# Altium PCB v2car.PcbDoc
Units mil, origin at the board's own origin, x right, y up, seen from the top; angles counter-clockwise.
Board outline 2911 x 2468.99 mil, 2 copper layers (Top Layer, Bottom Layer); 18 components, 25 nets, 119 pads, 46 vias.
Unrouted connection lines stored in the file: 45.
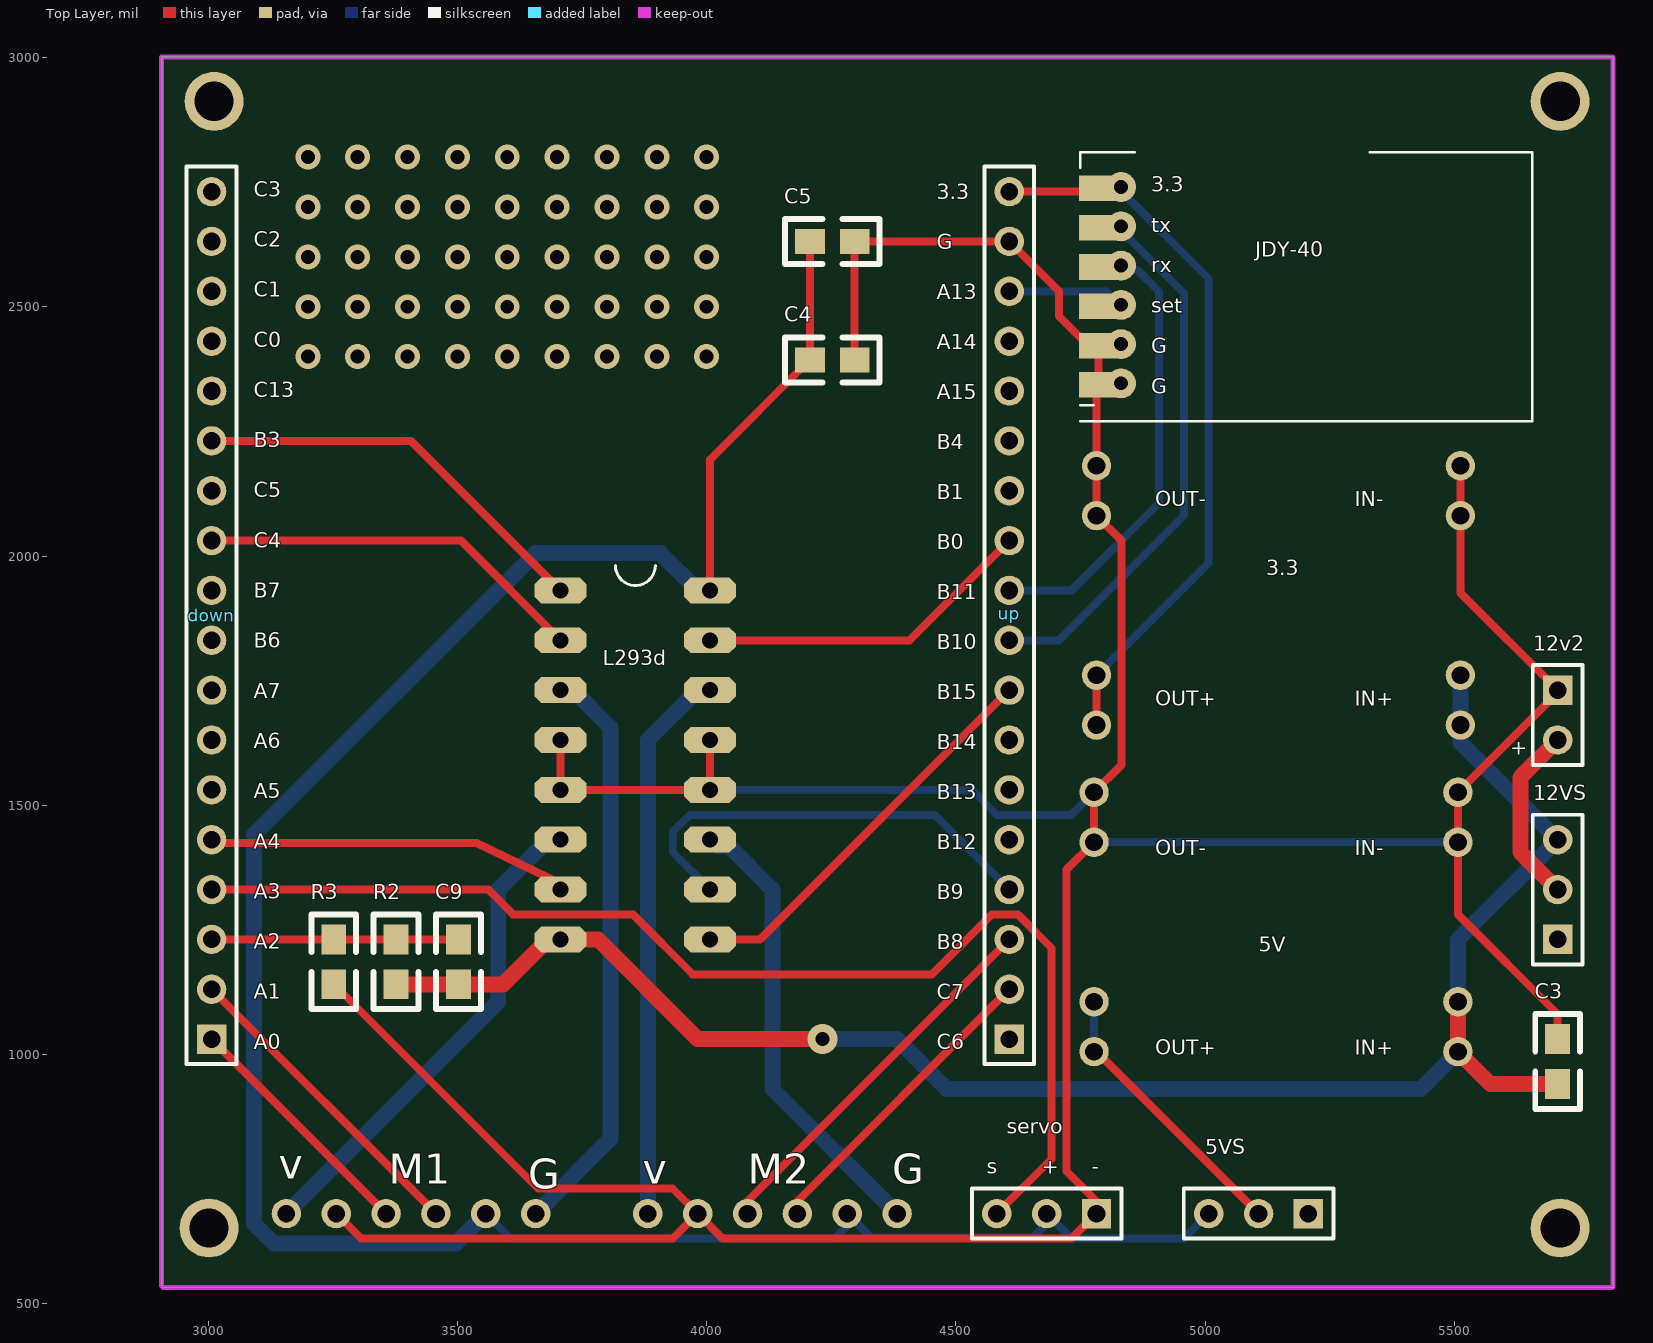
[diagram p0: Top Layer view]
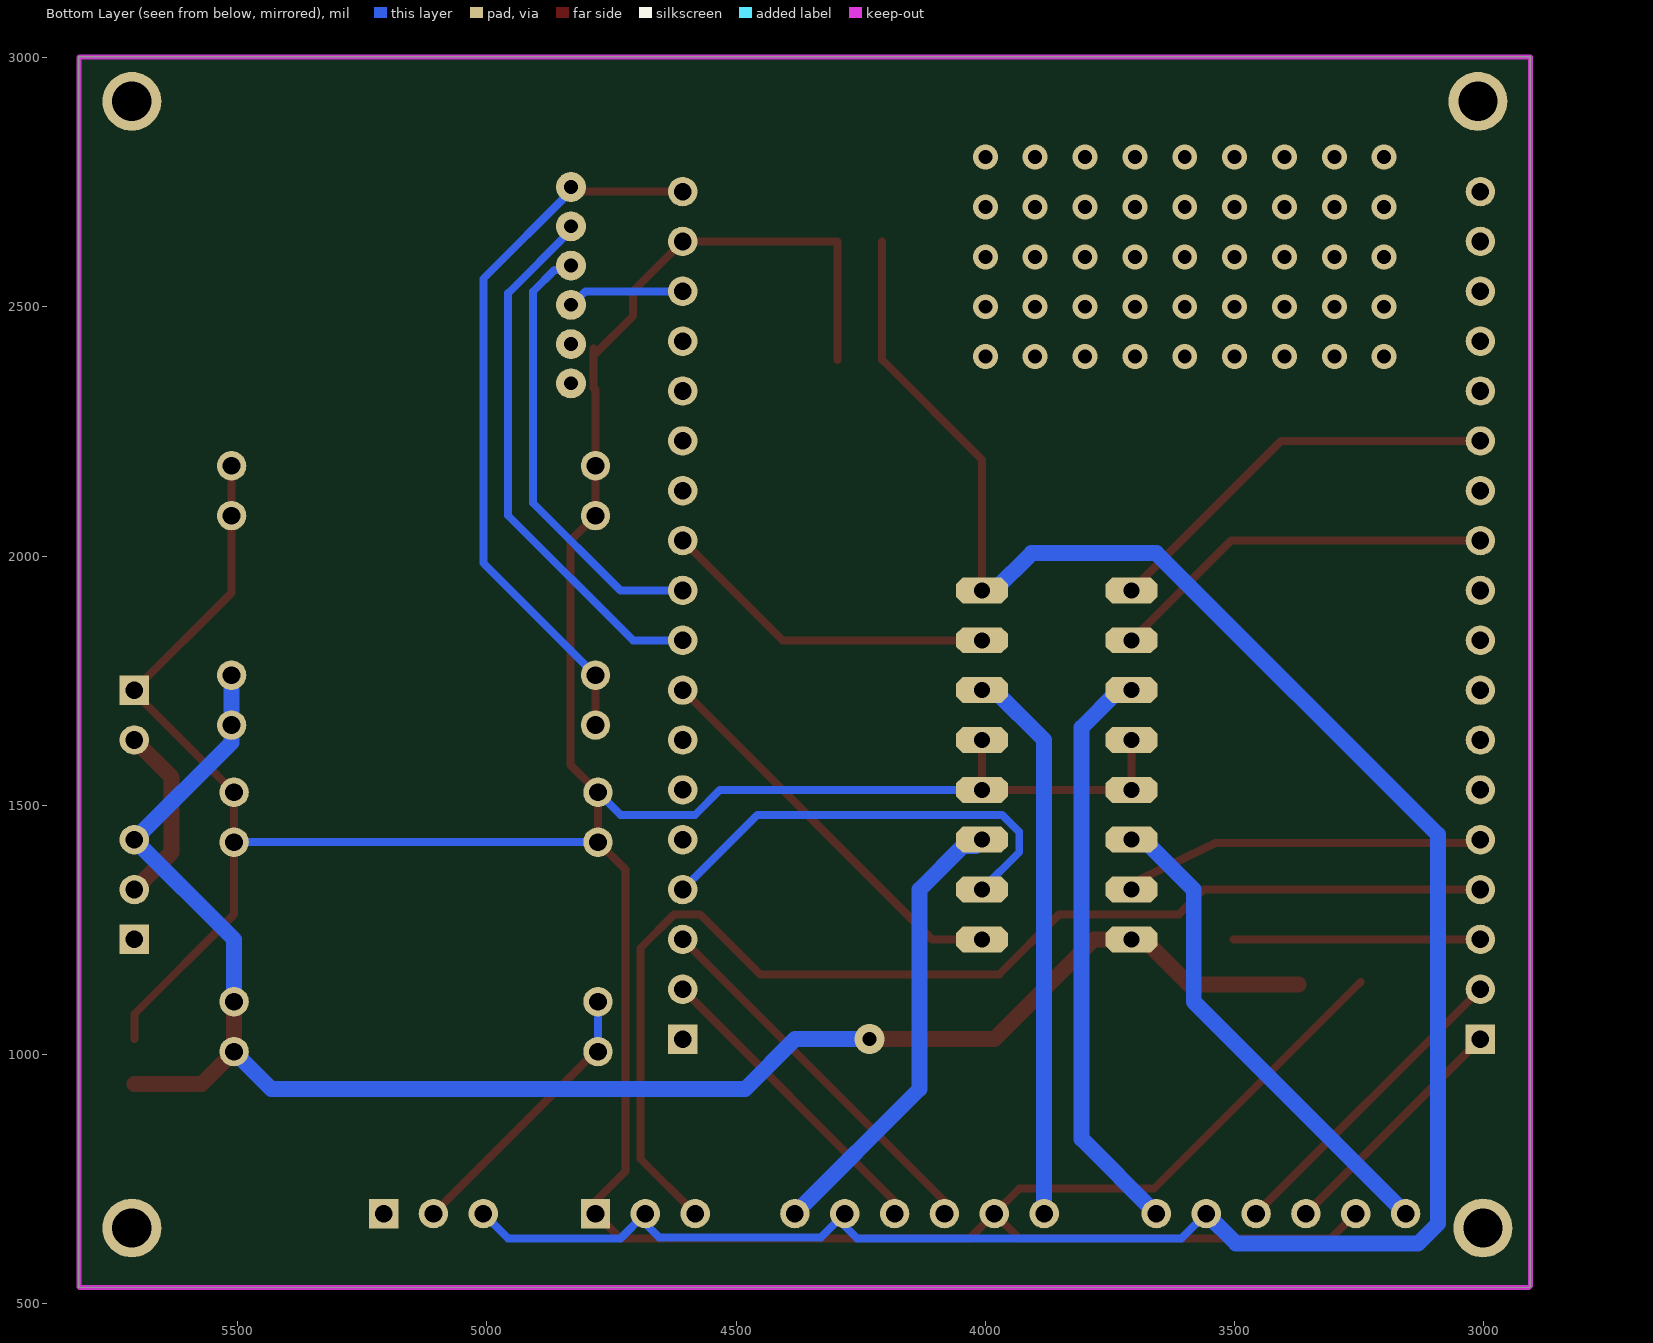
[diagram p1: Bottom Layer view, seen from below]

## Layer stack, top to bottom
Top Solder: solder mask 0.4, Solder Resist, Dk 3.5
Top Layer: signal copper 1.4
Dielectric 1: dielectric 12.6, FR-4, Dk 4.8
Bottom Layer: signal copper 1.4
Bottom Solder: solder mask 0.4, Solder Resist, Dk 3.5

## Board outline
5818,532.01 5818,3001 2907,3001 2907,533.01

## Design rules (kind name [scope] priority, off if disabled: settings)
Clearance [All] p1: gap=10 ignorepadtopadclearanceinfootprint=FALSE except(0: Arc-Hole Track-Hole SMDPad-Hole THPad-Hole Via-Hole Fill-Hole Poly-Hole Region-Hole Text-Hole)
PolygonConnect [All] p1: connectstyle=Relief reliefconductorwidth=10 reliefentries=4 polygonreliefangle="90 Angle" airgapwidth=10
RoutingVias [All] p1: holewidth=28 width=50 viastyle="Through Hole" minholewidth=28 minwidth=50 maxholewidth=28 maxwidth=50
SolderMaskExpansion [All] p1: expansion=4
Width [All] p1: maxlimit=32 minlimit=16 preferedwidth=16
30 further rules are at their usual default settings.

## Components (designator, comment, footprint, x,y, rotation, side; value= is the part's Value field where it differs from the comment)
3.3 "Header 4X2" PCBCOMPONENT_1 5512,1761 r180 top
5V "Header 4X2" PCBCOMPONENT_1 5507,1106 r180 top
5VS "Header 3" HDR1X3 5207,681 r180 top
12v2 "Header 2" HDR1X2 5707,1731 r270 top
12VS "Header 3" HDR1X3 5707,1231 r90 top
C3 "Cap Pol1" 0805 5707,941 r90 top value=100uF
C4 "Cap Pol1" 0805 4207,2393.5 r0 top value=100uF
C5 "Cap" 0805 4297,2631 r180 top value=100pF
C9 "Cap" 0805 3502,1141 r90 top value=100NF
down "Header 18H" HDR1X18 3007,1031 r90 top
JDY-40 "MHDR1X6" JDY-401 5301.21,2810.05 r270 top
L293d "" PCBComponent_1#1 3897,1589 r0 top
M1 "Header 6" PCBComponent_1#2 3157,681 r90 top
M2 "Header 6" PCBComponent_1#2 3882,681 r90 top
R2 "Res1" 0805 3377,1231 r270 top value=1K
R3 "Res1" 0805 3252,1141 r90 top value=10K
servo "Header 3" HDR1X3 4782,681 r180 top
up "Header 18" HDR1X18 4607,1031 r90 top

## Footprints (in the part's own frame and the unit in brackets; to place one, negate y for a bottom-side part, rotate by r counter-clockwise, add the part's x,y. Pads: shape width x height; smd on the part's side, far side on the other; paste and mask are expansions set on the pad)
0805 [mil]
  rect 60x50 smd: 1(0,0) 2(90,0)
  silkscreen extent -50,-45 140,45
HDR1X2 [mm] "Connector; Header; 2 Position"
  rect 1.5x1.5 hole 0.9: 1(0,0)
  round 1.5 hole 0.9: 2(2.54,0)
  silkscreen extent -1.27,-1.27 3.81,1.27
HDR1X3 [mm] "Connector; Header; 3 Position"
  rect 1.5x1.5 hole 0.9: 1(0,0)
  round 1.5 hole 0.9: 2(2.54,0) 3(5.08,0)
  silkscreen extent -1.27,-1.27 6.35,1.27
HDR1X18 [mm] "Connector; Header; 18 Position"
  rect 1.5x1.5 hole 0.9: 1(0,0)
  round 1.5 hole 0.9: 2(2.54,0) 3(5.08,0) 4(7.62,0) 5(10.16,0) 6(12.7,0) 7(15.24,0) 8(17.78,0) 9(20.32,0) 10(22.86,0) 11(25.4,0) 12(27.94,0) 13(30.48,0) 14(33.02,0) 15(35.56,0) 16(38.1,0) 17(40.64,0) 18(43.18,0)
  silkscreen extent -1.27,-1.27 44.45,1.27
JDY-401 [mm]
  round 1.524 hole 0.7: 1(11.778,-11.938) 2(9.778,-11.938) 3(7.778,-11.938) 4(5.778,-11.938) 5(3.778,-11.938) 6(1.778,-11.938)
  rect 1.3x2 smd: 1(11.85,-13.092) 2(9.85,-13.092) 3(7.85,-13.092) 4(5.85,-13.092) 5(3.85,-13.092) 6(1.85,-13.092)
  silkscreen extent 0,-14.02 13.7,9.01
PCBCOMPONENT_1 [mm]
  round 1.5 hole 0.9: 1(0,2.54) 2(18.542,2.54) 3(0,0) 4(18.542,0) 5(0,-8.128) 6(18.542,-8.128) 7(0,-10.668) 8(18.542,-10.668)
PCBComponent_1#1 [mil]
  oct 104x52 hole 32: 1(-190,342) 2(-190,242) 3(-190,142) 4(-190,42) 5(-190,-58) 6(-190,-158) 7(-190,-258) 8(-190,-358) 9(110,-358) 10(110,-258) 11(110,-158) 12(110,-58) 13(110,42) 14(110,142) 15(110,242) 16(110,342)
  silkscreen extent -80,352 0,392
PCBComponent_1#2 [mil]
  round 59.06 hole 35.43: 1(0,0) 2(0,-100) 3(0,-200) 4(0,-300) 5(0,-400) 6(0,-500)

## Part data
3.3 5V: "Header, 4-Pin, Dual row", LatestRevisionDate=17-Jul-2002, LatestRevisionNote="Re-released for DXP Platform.", Publisher="Altium Limited"
5VS 12VS servo: "Header, 3-Pin", LatestRevisionDate=17-Jul-2002, LatestRevisionNote="Re-released for DXP Platform.", Publisher="Altium Limited"
12v2: "Header, 2-Pin", LatestRevisionDate=17-Jul-2002, LatestRevisionNote="Re-released for DXP Platform.", Publisher="Altium Limited"
C3 C4: "Polarized Capacitor (Radial)", LatestRevisionDate=17-Jul-2002, LatestRevisionNote="Re-released for DXP Platform.", PackageReference=RB7.6-15, Published=8-Jun-2000, Publisher="Altium Limited"
C5 C9: "Capacitor", LatestRevisionDate=17-Jul-2002, LatestRevisionNote="Re-released for DXP Platform.", PackageReference=RAD-0.3, Published=8-Jun-2000, Publisher="Altium Limited"
down: "Header, 18-Pin, Right Angle", LatestRevisionDate=17-Jul-2002, LatestRevisionNote="Re-released for DXP Platform.", Publisher="Altium Limited"
JDY-40 M1 M2: "Header, 6-Pin", LatestRevisionDate=17-Jul-2002, LatestRevisionNote="Re-released for DXP Platform.", Publisher="Altium Limited"
L293d: library part L293E
R2 R3: "Resistor", LatestRevisionDate=17-Jul-2002, LatestRevisionNote="Re-released for DXP Platform.", PackageDescription="Axial Device, Thru-Hole; 2 Leads; 0.3 in Pin Spacing", PackageReference=AXIAL-0.3, Published=8-Jun-2000, Publisher="Altium Limited"
up: "Header, 18-Pin", LatestRevisionDate=17-Jul-2002, LatestRevisionNote="Re-released for DXP Platform.", Publisher="Altium Limited"

## Free pads (board coordinates)
  round 118.11 hole 78.74: 4(3002,652.06) 4(3012,2912.06) 4(5712,652.06) 4(5712,2912.06)

## Via types
v1: diameter 50, hole 28, Top Layer to Bottom Layer, 45 vias
v2: diameter 60, hole 28, Top Layer to Bottom Layer, 1 vias

## Nets (pads, with @x,y where several pads share a name; then routed paths per layer and width w, separated by ;. In a path a pad name is that pad's centre, name@x,y a point inside that pad or via, vN(x,y) a via of type N, cw(c..) or ccw(c..) an arc to the next point about the centre after c; other vN are vias at no path point)
+3: 3.3.2 3.3.4 JDY-40.6 up.18 | length 1460.7
  Top Layer w16: up.18 4785.8,2731 JDY-40.6@4832,2731 ; 3.3.2 3.3.4
  Bottom Layer w16: 3.3.4 5007,1986 5007,2556 JDY-40.6@4832,2731
+5: 5VS.3 C4.1 C5.2 L293d.16 M1.5 M2.5 servo.2 | length 4824.8
  Top Layer w16: L293d.16 4007,2193.5 C4.1 C5.2
  Bottom Layer w16: M1.5 3607,631 4257,631 4282,656 M2.5 ; L293d.16@3982,1931 L293d.16 ; M2.5@4298.39,664.61 4329.53,633.47 4654.53,633.47 4682,660.94 servo.2 4732,631 4957,631 5VS.3
  Bottom Layer w32: M1.5 3497,621 3132,621 3092,661 3092,1441 3657,2006 3907,2006 L293d.16@3982,1931
+12: 3.3.1 3.3.3 5V.1 5V.3 12VS.3 C3.1 C9.1 L293d.8 R2.2 | length 3398.1
  Top Layer w32: R2.2@3372,1141 3592,1141 L293d.8@3682,1231 ; L293d.8@3732,1231 3782,1231 3982,1031 v2@4207,1031 ; 5V.3 5V.1 5572,941 C3.1
  Bottom Layer w32: v2(4232,1031) 4382,1031 4482,931 5432,931 5V.1 ; 5V.3 5507,1231 12VS.3 5512,1626 3.3.1 3.3.3
E1a: down.2 M1.4 | length 636.4
  Top Layer w16: down.2 M1.4
E1b: down.1 M1.3 | length 495
  Top Layer w16: down.1 M1.3
E2a: M2.3 up.3 | length 767.5
  Top Layer w16: M2.3 4082,706 up.3
E2b: M2.4 up.2 | length 630.6
  Top Layer w16: M2.4 4182,706 4599.26,1123.26 up.2@4614.74,1123.26
GND: 3.3.5 3.3.6 3.3.7 3.3.8 5V.5 5V.6 5V.7 5V.8 12v2.1 C3.2 C4.2 C5.1 JDY-40.1 JDY-40.2 L293d.4 L293d.5 L293d.12 L293d.13 M1.2 M2.2 R3.1 servo.1 up.17 | length 8644
  Top Layer w16: R3.1@3247,1146 R3.1 3662,731 3932,731 M2.2 ; M1.2 3307,631 3932,631 M2.2 ; L293d.4 L293d.5 L293d.12 L293d.13 ; C4.2 C5.1 up.17 4707,2531 4707,2481 JDY-40.2@4782,2406 ; JDY-40.2@4785.8,2416.04 4785.8,2337.3 4782,2333.5 3.3.8 3.3.6 4832,2031 4832,1581 5V.8 5V.6 4722,1371 4722,766 4782,706 servo.1 4732,631 4032,631 M2.2 ; 3.3.7 3.3.5 5512,1926 12v2.1 5707,1726 5V.7 5V.5 5507,1281 5707,1081 C3.2
  Bottom Layer w16: L293d.12 4532,1531 4582,1481 4732,1481 5V.8 ; 5V.6 5V.5
  other v1: 3200,2400 3300,2400 3400,2400 3500,2400 3600,2400 3700,2400 3800,2400 3900,2400 4000,2400 3200,2500 3300,2500 3400,2500 3500,2500 3600,2500 3700,2500 3800,2500 3900,2500 4000,2500 3200,2600 3300,2600 3400,2600 3500,2600 3600,2600 3700,2600 3800,2600 3900,2600 4000,2600 3200,2700 3300,2700 3400,2700 3500,2700 3600,2700 3700,2700 3800,2700 3900,2700 4000,2700 3200,2800 3300,2800 3400,2800 3500,2800 3600,2800 3700,2800 3800,2800 3900,2800 4000,2800
in11: down.11 L293d.2 | length 782.8
  Top Layer w16: down.11 3507,2031 L293d.2
in12: down.5 L293d.7 | length 743.5
  Top Layer w16: down.5@3022,1431 3028.19,1424.81 3537.17,1424.81 3711.7,1340.77 L293d.7@3732,1331
  Bottom Layer w16: L293d.7 L293d.7@3707,1340.54
in21: L293d.10 up.4 | length 898
  Bottom Layer w16: L293d.10 3932,1406 3932,1446.46 3966.54,1481 4457,1481 up.4
in22: L293d.15 up.11 | length 682.8
  Top Layer w16: L293d.15 4407,1831 up.11
Net5v_2: 5V.2 5V.4 5VS.2 | length 564.6
  Top Layer w16: 5V.2@4782,1006 5VS.2
  Bottom Layer w16: 5V.4 5V.2 5V.2@4782,1006
Net12v2_2: 12v2.2 12VS.2 | length 362.1
  Top Layer w32: 12VS.2 5632,1406 5632,1556 12v2.2
NetL293d_3: L293d.3 M1.6 | length 1143.2
  Bottom Layer w32: M1.6 3807,831 3807,1656 L293d.3@3732,1731
NetL293d_6: L293d.6 M1.1 | length 967.5
  Bottom Layer w32: M1.1 3582,1106 3582,1331 L293d.6@3682,1431
NetL293d_11: L293d.11 M2.6 | length 902.3
  Bottom Layer w32: L293d.11@4019.5,1418.5 4044.5,1418.5 4132,1331 4132,931 M2.6
NetL293d_14: L293d.14 M2.1 | length 1091.4
  Bottom Layer w32: M2.1 3882,1631 L293d.14@3982,1731
p1: down.13 L293d.1 | length 824.3
  Top Layer w16: down.13 3407,2231 L293d.1
p2: L293d.9 up.8 | length 807.1
  Top Layer w16: L293d.9 4107,1231 up.8
rx: JDY-40.4 up.10 | length 890.1
  Bottom Layer w16: up.10 4732,1931 4907,2106 4907,2531 4864.48,2573.52 JDY-40.4@4832,2573.52
Servo: down.4 servo.3 | length 2411
  Top Layer w16: down.4 3562,1331 3612,1281 3852,1281 3972,1161 4452,1161 4572,1281 4624.21,1281 4692,1213.21 4692,791 servo.3
set: JDY-40.3 up.16 | length 209.1
  Bottom Layer w16: up.16 4802,2531 JDY-40.3@4812,2521
tx: JDY-40.5 up.9 | length 1076.6
  Bottom Layer w16: up.9 4707,1831 4957,2081 4957,2527.26 JDY-40.5@4832,2652.26
Vd: C9.2 down.3 R2.1 R3.2 | length 490
  Top Layer w16: down.3@3012,1231 R3.2 R2.1 C9.2
pads on no net: 5VS.1 12VS.1 down.6 down.7 down.8 down.9 down.10 down.12 down.14 down.15 down.16 down.17 down.18 up.1 up.5 up.6 up.7 up.12 up.13 up.14 up.15

## Keep-outs
Keep-Out Layer:
  lines w10: 2907,536 2910,533 5817,533 5818,534 5818,3000 5817,3001 2907,3001 2907,536

## Other copper
Top Layer:
  pour cut-out: 2741,2545

## Silkscreen, mask and mechanical layers (free items; w line width, h text height)
Top Overlay:
  text "3.3" at 4892,2731 h30
  text "C3" at 3092,2721 h30
  text "3.3" at 4462,2716 h30
  text "tx" at 4892,2649.94 h30
  text "C2" at 3092,2620.41 h30
  text "G" at 4462,2615.71 h30
  text "rx" at 4892,2568.88 h30
  text "C1" at 3092,2519.82 h30
  text "A13" at 4462,2515.41 h30
  text "set" at 4892,2487.82 h30
  text "C0" at 3092,2419.23 h30
  text "A14" at 4462,2415.12 h30
  text "G" at 4892,2406.76 h30
  text "G" at 4892,2325.71 h30
  text "C13" at 3092,2318.65 h30
  text "A15" at 4462,2314.82 h30
  text "B3" at 3092,2218.06 h30
  text "B4" at 4462,2214.53 h30
  text "C5" at 3092,2117.47 h30
  text "B1" at 4462,2114.24 h30
  text "C4" at 3092,2016.88 h30
  text "B0" at 4462,2013.94 h30
  text "B7" at 3092,1916.29 h30
  text "B11" at 4462,1913.65 h30
  text "B6" at 3092,1815.71 h30
  text "B10" at 4462,1813.35 h30
  text "A7" at 3092,1715.12 h30
  text "B15" at 4462,1713.06 h30
  text "A6" at 3092,1614.53 h30
  text "B14" at 4462,1612.76 h30
  text "+" at 5612,1601 h30
  text "A5" at 3092,1513.94 h30
  text "B13" at 4462,1512.47 h30
  text "A4" at 3092,1413.35 h30
  text "B12" at 4462,1412.18 h30
  text "A3" at 3092,1312.76 h30
  text "B9" at 4462,1311.88 h30
  text "A2" at 3092,1212.18 h30
  text "B8" at 4462,1211.59 h30
  text "A1" at 3092,1111.59 h30
  text "C7" at 4462,1111.29 h30
  text "A0" at 3092,1011 h30
  text "C6" at 4462,1011 h30
  text "s" at 4562,761 h30
  text "+" at 4672,761 h30
  text "-" at 4772,761 h30

## Text inside footprints (layer, text, board x,y; h text height)
3.3: Top Overlay "OUT-" at 4900,2100 h30; Top Overlay "OUT+" at 4900,1700 h30; Top Overlay "IN+" at 5300,1700 h30; Top Overlay "IN-" at 5300,2100 h30
5V: Top Overlay "IN-" at 5300,1400 h30; Top Overlay "IN+" at 5300,1000 h30; Top Overlay "OUT+" at 4900,1000 h30; Top Overlay "OUT-" at 4900,1400 h30
M1: Top Overlay "v" at 3142,751 h60; Top Overlay "G" at 3642,731 h60
M2: Top Overlay "v" at 3872,741 h60; Top Overlay "G" at 4372,741 h60